# Altium PCB E22 FeatherWing.PcbDoc
Units mm, origin at the board's own origin, x right, y up, seen from the top; angles counter-clockwise.
Board outline 50.8 x 22.86 mm, 2 copper layers (Top Layer, Bottom Layer); 4 components, 12 nets, 56 pads, 5 vias.
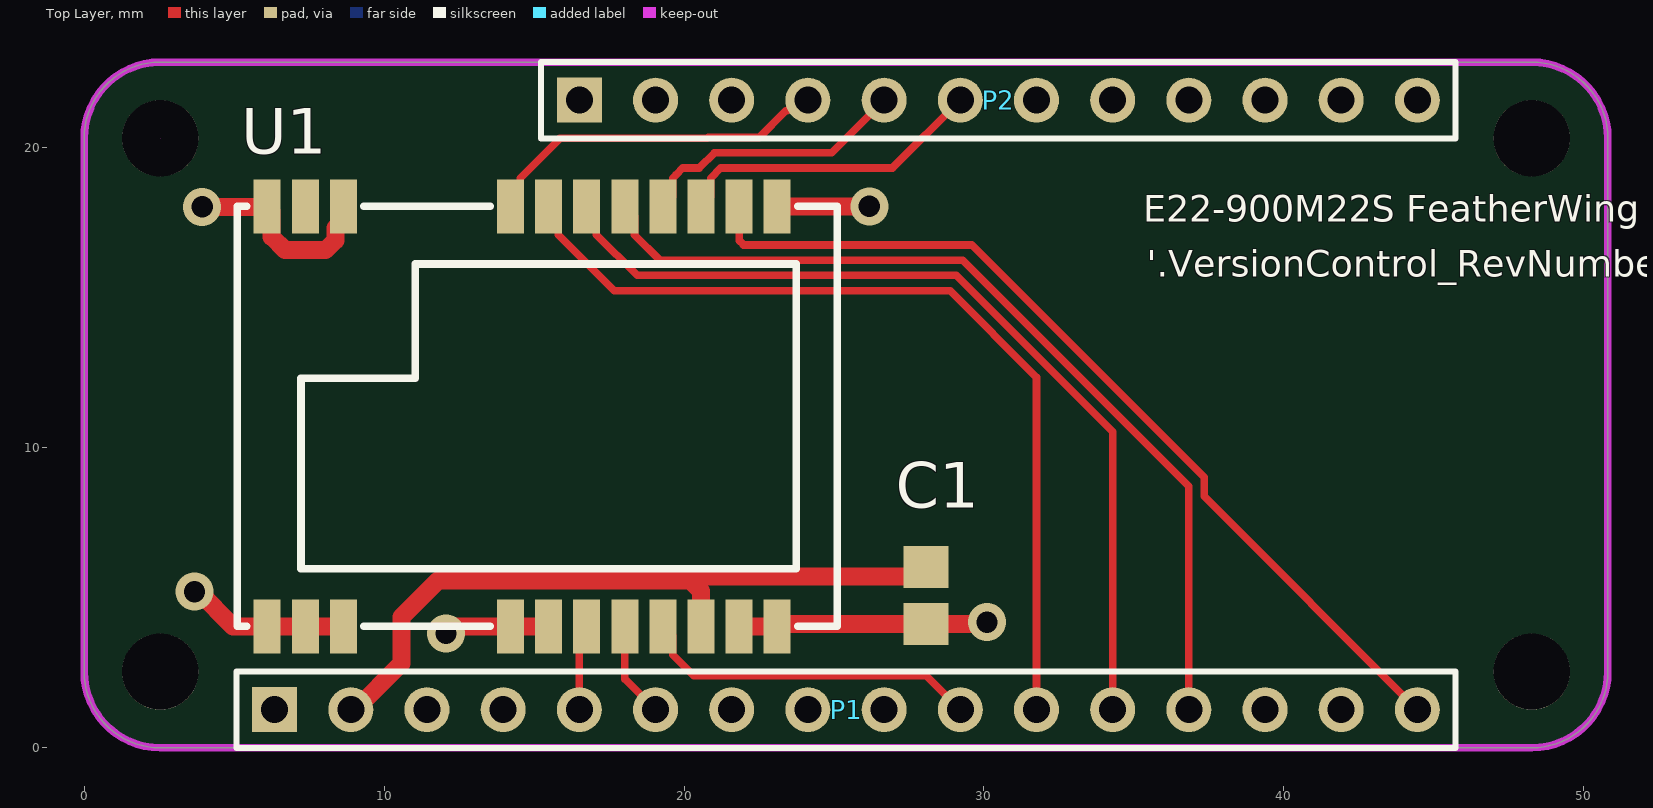
[diagram p0: Top Layer view]
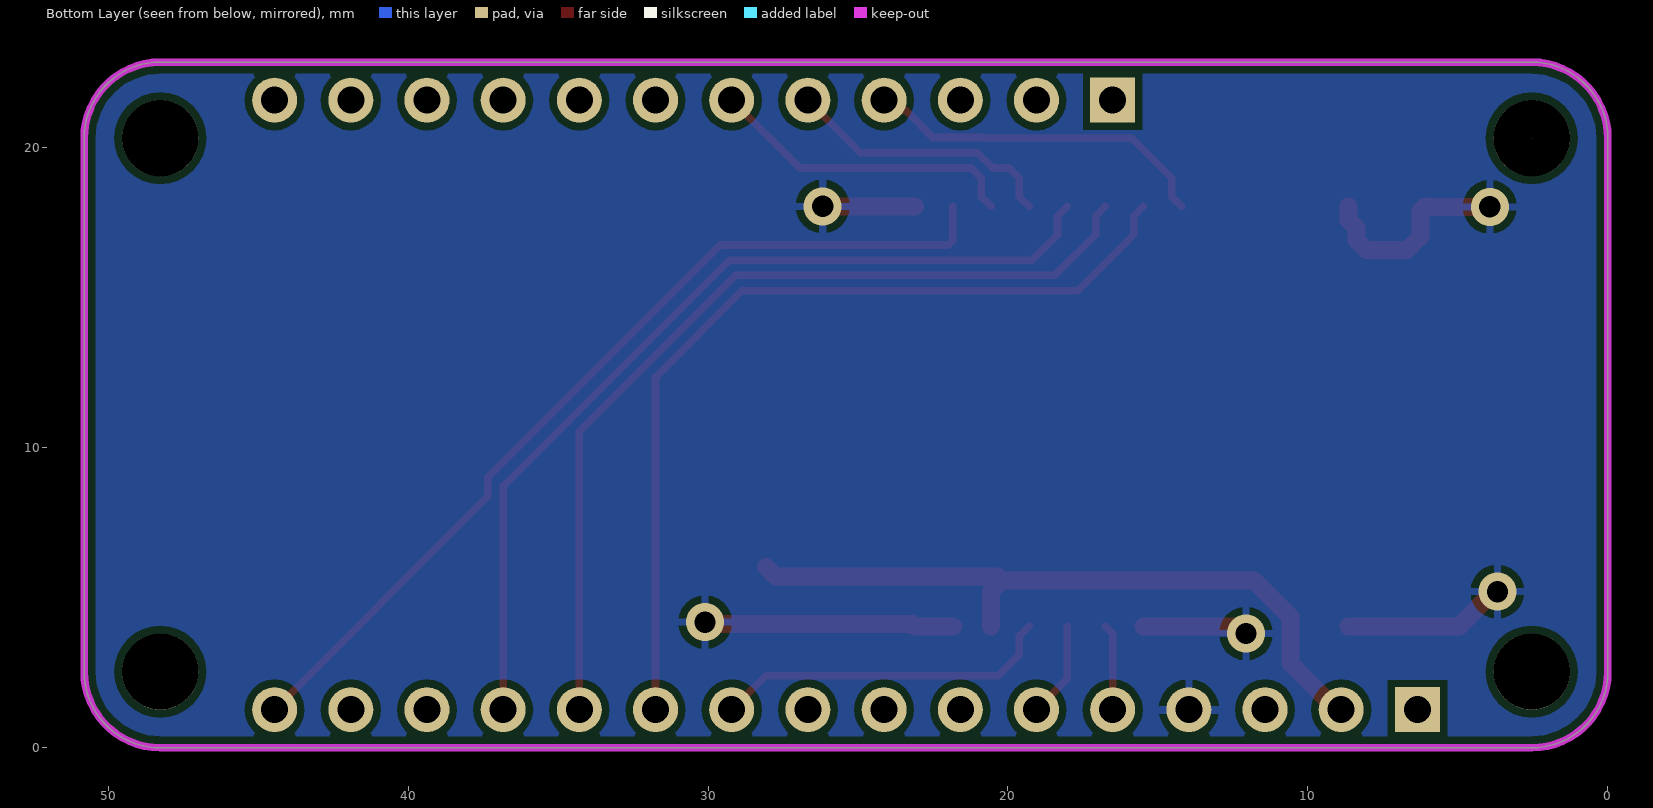
[diagram p1: Bottom Layer view, seen from below]

## Layer stack, top to bottom
Top Solder: solder mask 0.0102, Solder Resist, Dk 3.5
Top Layer: signal copper 0.0356
Dielectric 1: dielectric 0.32, FR-4, Dk 4.8
Bottom Layer: signal copper 0.0356
Bottom Solder: solder mask 0.0102, Solder Resist, Dk 3.5

## Board outline
2.54,0 cw(c2.54,2.54) 0,2.54 0,20.32 cw(c2.54,20.32) 2.54,22.86 48.26,22.86 cw(c48.26,20.32) 50.8,20.32 50.8,2.54 cw(c48.26,2.54) 48.26,0
cut-out: 2.54,20.32

## Design rules (kind name [scope] priority, off if disabled: settings)
Clearance [All] p1: gap=0.254 ignorepadtopadclearanceinfootprint=FALSE except(0: Arc-Hole Track-Hole SMDPad-Hole THPad-Hole Via-Hole Fill-Hole Poly-Hole Region-Hole Text-Hole)
PolygonConnect [All] p1: connectstyle=Relief reliefconductorwidth=0.254 reliefentries=4 polygonreliefangle="90 Angle" airgapwidth=0.254
RoutingVias [All] p1: holewidth=0.711 width=1.27 viastyle="Through Hole" minholewidth=0.711 minwidth=1.27 maxholewidth=0.711 maxwidth=1.27
SolderMaskExpansion [All] p1: expansion=0.102 istentingtop=FALSE
Width Width_1 [(InNet('3V3') OR InNet('GND'))] p1: maxlimit=0.6 minlimit=0.6 preferedwidth=0.6 minimp=50.000000 maximp=50.000000 favimp=50.000000
Width [All] p2: maxlimit=0.254 minlimit=0.254 preferedwidth=0.254
30 further rules are at their usual default settings.

## Components (designator, comment, footprint, x,y, rotation, side; value= is the part's Value field where it differs from the comment)
C1 "10uF" CAPC2013X135X45ML10T25 28.067,5.08 r90 top
P1 "Header 16" HDR1X16 6.35,1.27 r0 top locked
P2 "Header 12" HDR1X12 16.51,21.59 r0 top locked
U1 "E22-900M22S" WIRELM-SMD_E22-900M22S 14.605,11.049 r270 top

## Footprints (in the part's own frame and the unit in brackets; to place one, negate y for a bottom-side part, rotate by r counter-clockwise, add the part's x,y. Pads: shape width x height; smd on the part's side, far side on the other; paste and mask are expansions set on the pad)
CAPC2013X135X45ML10T25 [mm] "Chip Capacitor, 2-Leads, Body 2.00x1.25mm, IPC Low Density"
  rect 1.4x1.5 smd: 1(-0.95,0) 2(0.95,0)
  body extent -1.05,-0.67 1.05,0.67, height 1.35
HDR1X12 [mm] "Connector; Header; 12 Position"
  rect 1.5x1.5 hole 0.9: 1(0,0)
  round 1.5 hole 0.9: 2(2.54,0) 3(5.08,0) 4(7.62,0) 5(10.16,0) 6(12.7,0) 7(15.24,0) 8(17.78,0) 9(20.32,0) 10(22.86,0) 11(25.4,0) 12(27.94,0)
  silkscreen extent -1.27,-1.27 29.21,1.27
HDR1X16 [mm] "Connector; Header; 16 Position"
  rect 1.5x1.5 hole 0.9: 1(0,0)
  round 1.5 hole 0.9: 2(2.54,0) 3(5.08,0) 4(7.62,0) 5(10.16,0) 6(12.7,0) 7(15.24,0) 8(17.78,0) 9(20.32,0) 10(22.86,0) 11(25.4,0) 12(27.94,0) 13(30.48,0) 14(33.02,0) 15(35.56,0) 16(38.1,0)
  silkscreen extent -1.27,-1.27 39.37,1.27
WIRELM-SMD_E22-900M22S [mm]
  rect 1.8x0.9 smd: 1(7,-8.5) 2(7,-7.23) 3(7,-5.96) 4(7,-0.39) 5(7,0.88) 6(7,2.15) 7(7,3.42) 8(7,4.69) 9(7,5.96) 10(7,7.23) 11(7,8.5) 12(-7,8.5) 13(-7,7.23) 14(-7,5.96) 15(-7,4.69) 16(-7,3.42) 17(-7,2.15) 18(-7,0.88) 19(-7,-0.39) 20(-7,-5.96) 21(-7,-7.23) 22(-7,-8.5)
  silkscreen extent -7,-9.5 7,10.5

## Part data
C1: library part CMP-2007-03541-1, Manufacturer=Murata, Part Number=GRM21BR61E106KA73L
P1: "Header, 16-Pin", LatestRevisionDate=17-Jul-2002, LatestRevisionNote="Re-released for DXP Platform.", Publisher="Altium Limited"
P2: "Header, 12-Pin", LatestRevisionDate=17-Jul-2002, LatestRevisionNote="Re-released for DXP Platform.", Publisher="Altium Limited"
U1: "E22-900M22S From EByte"

## Free pads (board coordinates)
  round 2.54 hole 2.54: 1(2.54,2.54) 1(2.54,20.32) 1(48.26,2.54) 1(48.26,20.32)

## Via types
v1: diameter 1.27, hole 0.711, Top Layer to Bottom Layer, 5 vias

## Nets (pads, with @x,y where several pads share a name; then routed paths per layer and width w, separated by ;. In a path a pad name is that pad's centre, name@x,y a point inside that pad or via, vN(x,y) a via of type N, cw(c..) or ccw(c..) an arc to the next point about the centre after c; other vN are vias at no path point)
3V3: C1.2 P1.2 U1.9 | length 23.7
  Top Layer w0.6: P1.2 9.038,1.27 10.587,2.819 10.587,4.364 11.802,5.579 20.213,5.579 ; U1.9 20.565,5.227 20.213,5.579 ; C1.2 27.752,5.715 20.35,5.715 20.213,5.579
BUSY: P2.6 U1.14 | length 10.5
  Top Layer w0.254: U1.14 20.888,18.372 20.888,18.991 21.227,19.33 26.95,19.33 P2.6
DIO1: P1.16 U1.13 | length 30.6
  Top Layer w0.254: U1.13 21.835,16.913 21.984,16.764 29.591,16.764 37.338,9.017 37.338,8.382 P1.16
DIO2: P1.10 U1.8 | length 11.4
  Top Layer w0.254: U1.8 19.618,3.726 19.618,3.107 20.324,2.401 28.079,2.401 P1.10
GND: C1.1 P1.4 U1.1 U1.2 U1.3 U1.4 U1.5 U1.10 U1.11 U1.12 U1.20 U1.22 | length 27.3
  Top Layer w0.6: v1(3.683,5.207) 3.81,5.207 4.968,4.049 U1.1 U1.2 U1.3 ; v1(3.937,18.034) 6.09,18.034 U1.22 6.255,17.899 6.255,17.035 6.696,16.595 8.054,16.595 8.379,16.92 8.379,17.333 8.645,17.599 U1.20 ; v1(12.065,3.81) 12.304,4.049 U1.4 U1.5 ; U1.10 U1.11 23.186,4.13 C1.1 30.038,4.13 v1(30.099,4.191) ; U1.12 v1(26.177,18.049)
MISO: P1.13 U1.16 | length 30.5
  Top Layer w0.254: U1.16 18.348,17.726 18.348,17.107 19.199,16.256 29.297,16.256 36.83,8.723 P1.13
MOSI: P1.12 U1.17 | length 30.3
  Top Layer w0.254: U1.17 17.078,17.726 17.078,17.107 18.437,15.748 29.079,15.748 34.29,10.537 P1.12
NRST: P2.5 U1.15 | length 9.2
  Top Layer w0.254: U1.15 19.618,18.372 19.618,18.983 19.734,19.099 19.734,19.107 19.957,19.33 20.509,19.33 21.017,19.838 24.918,19.838 P2.5
NSS: P2.4 U1.19 | length 11.7
  Top Layer w0.254: U1.19 14.538,18.372 14.538,18.991 15.867,20.32 20.78,20.32 20.806,20.346 22.505,20.346 23.394,21.235 23.438,21.235 23.793,21.59 P2.4
RXEN: P1.5 U1.6 | length 2.9
  Top Layer w0.254: P1.5 16.51,3.804 U1.6
SCK: P1.11 U1.18 | length 30.1
  Top Layer w0.254: U1.18 15.808,17.726 15.808,17.107 17.675,15.24 28.869,15.24 31.75,12.359 P1.11
TXEN: P1.6 U1.7 | length 3.2
  Top Layer w0.254: U1.7 18.025,2.295 P1.6
pads on no net: P1.1 P1.3 P1.7 P1.8 P1.9 P1.14 P1.15 P2.1 P2.2 P2.3 P2.7 P2.8 P2.9 P2.10 P2.11 P2.12 U1.21

## Polygon pours and split planes (outlines as drawn)
GND on Bottom Layer "GND_L02_P002" (solid, pour order 2): 50.8,0 50.8,22.86 0,22.86 0,0

## Keep-outs
Keep-Out Layer:
  the board outline again, w0.254

## Other copper
Top Layer:

## Silkscreen, mask and mechanical layers (free items; w line width, h text height)
Top Overlay:
  text "E22-900M22S FeatherWing" at 35.306,17.24 h1.52
  text "'.VersionControl_RevNumber''" at 35.433,15.399 h1.52
Mechanical 1:
  lines w0.254: 48.26,22.86 2.54,22.86 ccw(c2.54,20.32) 0,20.32 0,2.54 ccw(c2.54,2.54) 2.54,0 48.26,0 ccw(c48.26,2.54) 50.8,2.54 50.8,20.32
  lines w1.6: 48.26,20.574 cw(c48.26,20.32) 48.514,20.32